# Altium PCB SMD Brushed Motor Driver V3.PcbDoc
Units mm, origin at the board's own origin, x right, y up, seen from the top; angles counter-clockwise.
Board outline 130.17 x 68.58 mm, 2 copper layers (Top Layer, Bottom Layer); 50 components, 23 nets, 136 pads, 11 vias.
Unrouted connection lines stored in the file: 1.
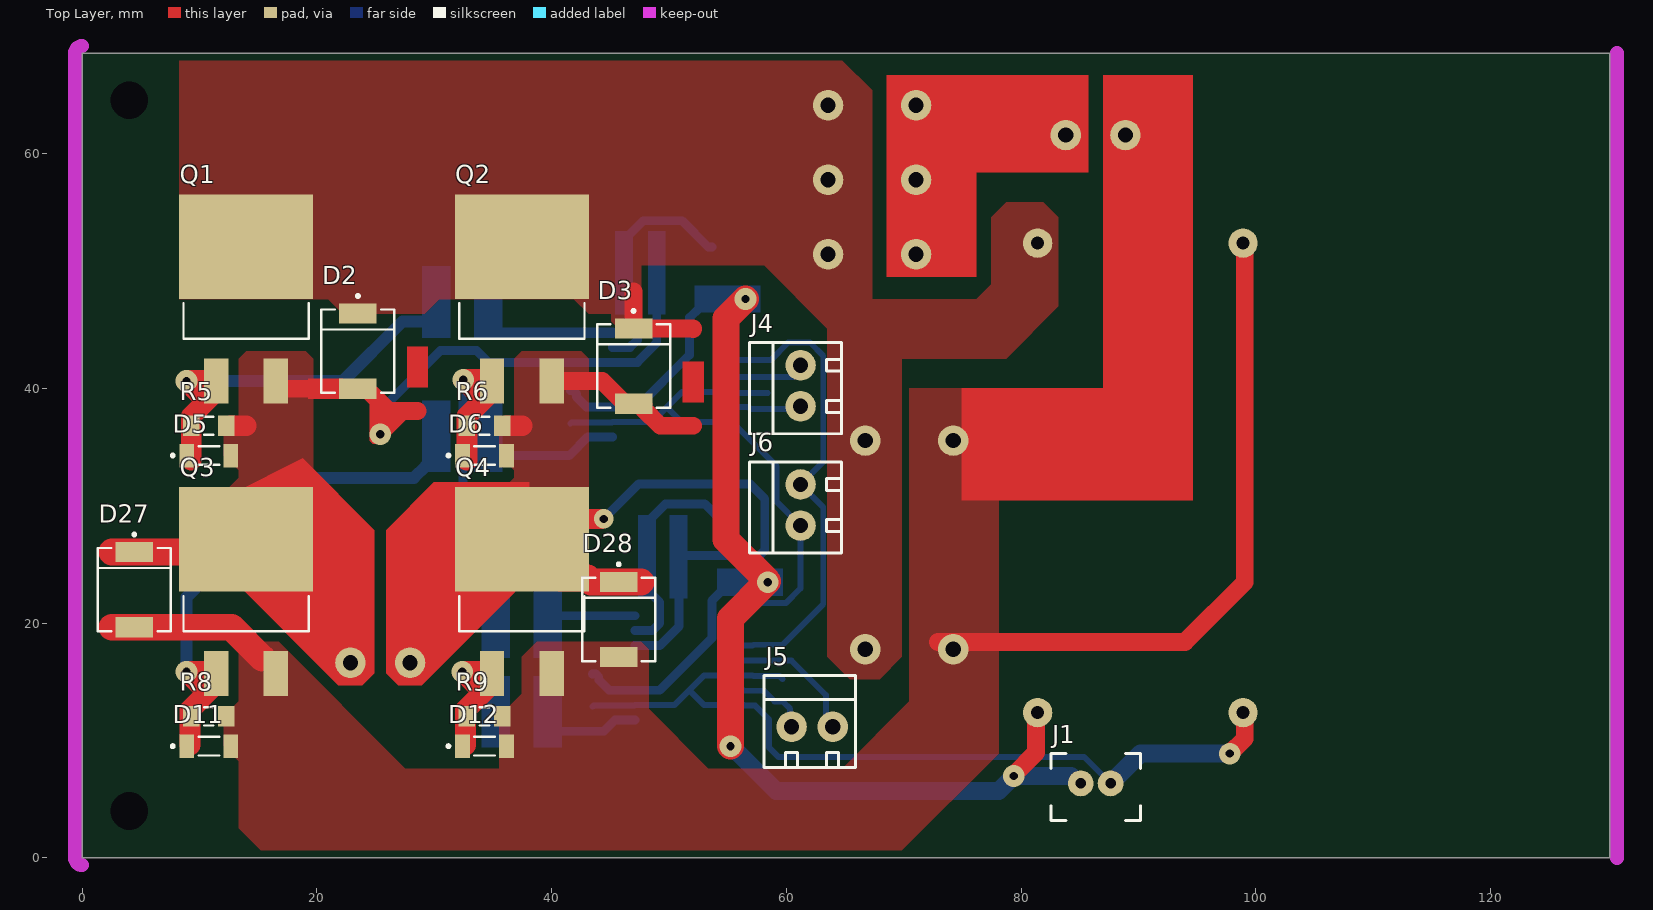
[diagram p0: Top Layer view]
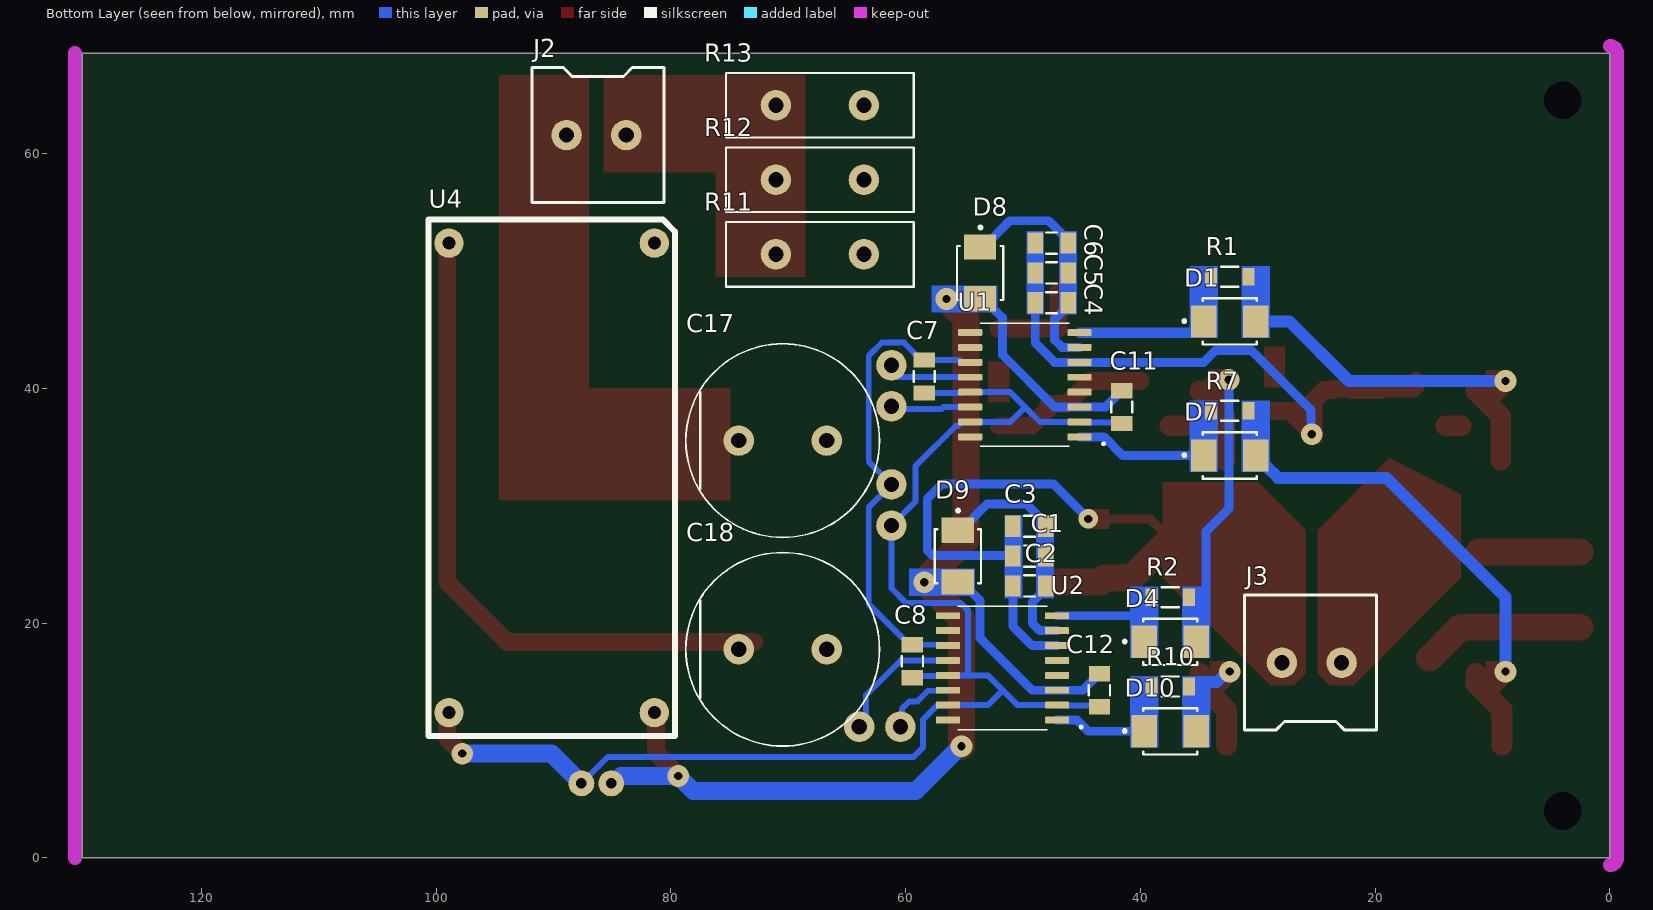
[diagram p1: Bottom Layer view, seen from below]

## Layer stack, top to bottom
Top Solder: solder mask 0.0102, Solder Resist, Dk 3.5
Top Layer: signal copper 0.0356
Dielectric 1: dielectric 0.32, FR-4, Dk 4.8
Bottom Layer: signal copper 0.0356
Bottom Solder: solder mask 0.0102, Solder Resist, Dk 3.5

## Board outline
0,0 0,68.58 130.175,68.58 130.175,0

## Design rules (kind name [scope] priority, off if disabled: settings)
Clearance [All] p1: gap=0.381 ignorepadtopadclearanceinfootprint=TRUE except(0: Arc-Hole Track-Hole SMDPad-Hole THPad-Hole Via-Hole Fill-Hole Poly-Hole Region-Hole Text-Hole)
Height [All] p1: minheight=0 maxheight=127 prefheight=12.7
PolygonConnect [All] p1: connectstyle=Direct reliefconductorwidth=0.254 reliefentries=4 polygonreliefangle="90 Angle" airgapwidth=0.254
RoutingVias [All] p1: holewidth=0.711 width=1.27 viastyle="Through Hole" minholewidth=0.711 minwidth=1.27 maxholewidth=0.711 maxwidth=1.27
SolderMaskExpansion [All] p1: expansion=0.102 istentingtop=FALSE
Width [All] p1: maxlimit=5.08 minlimit=0.254 preferedwidth=0.508 minimp=50.000000 maximp=50.000000 favimp=50.000000
29 further rules are at their usual default settings.

## Classes and differential pairs
component class "2101 Version": J4

## Components (designator, comment, footprint, x,y, rotation, side; value= is the part's Value field where it differs from the comment)
C1 "12061C474KAT2A" FP-1206-L_3_2_0_2-W_1_6_0-IPC_B 49.467,25.717 r0 bottom
C2 "12061C474KAT2A" FP-1206-L_3_2_0_2-W_1_6_0-IPC_B 49.467,23.177 r0 bottom
C3 "12061C474KAT2A" FP-1206-L_3_2_0_2-W_1_6_0-IPC_B 49.467,28.258 r0 bottom
C4 "12061C474KAT2A" FP-1206-L_3_2_0_2-W_1_6_0-IPC_B 47.561,47.307 r0 bottom
C5 "12061C474KAT2A" FP-1206-L_3_2_0_2-W_1_6_0-IPC_B 47.561,49.847 r0 bottom
C6 "12061C474KAT2A" FP-1206-L_3_2_0_2-W_1_6_0-IPC_B 47.561,52.387 r0 bottom
C7 "12065C104KAT2A" FP-1206-L_3_2_0_2-W_1_6_0-IPC_B 58.42,41.021 r270 bottom
C8 "12065C104KAT2A" FP-1206-L_3_2_0_2-W_1_6_0-IPC_B 59.436,16.764 r270 bottom
C11 "12065C104KAT2A" FP-1206-L_3_2_0_2-W_1_6_0-IPC_B 41.593,38.417 r270 bottom
C12 "12065C104KAT2A" FP-1206-L_3_2_0_2-W_1_6_0-IPC_B 43.498,14.287 r270 bottom
C17 "ECA1VM222" FP-RAD-TH-D_16_0_5-L_25_2-MFG 70.485,35.56 r180 bottom
C18 "ECA1VM222" FP-RAD-TH-D_16_0_5-L_25_2-MFG 70.485,17.78 r180 bottom
D1 "MURS120T3G" FP-403A-03-MFG 32.385,45.72 r180 bottom
D2 "SS34-E3/57T" FP-95402-MFG 23.495,43.18 r270 top
D3 "SS34-E3/57T" FP-95402-MFG 46.99,41.91 r270 top
D4 "MURS120T3G" FP-403A-03-MFG 37.464,18.415 r180 bottom
D5 "TZMC3V3-GS08" FP-6_560-5005_01-4-MFG 10.795,34.29 r0 top
D6 "TZMC3V3-GS08" FP-6_560-5005_01-4-MFG 34.29,34.29 r0 top
D7 "MURS120T3G" FP-403A-03-MFG 32.385,34.29 r180 bottom
D8 "MURS120T3G" FP-403A-03-MFG 53.657,49.847 r270 bottom
D9 "MURS120T3G" FP-403A-03-MFG 55.563,25.717 r270 bottom
D10 "MURS120T3G" FP-403A-03-MFG 37.465,10.795 r180 bottom
D11 "TZMC3V3-GS08" FP-6_560-5005_01-4-MFG 10.795,9.525 r0 top
D12 "TZMC3V3-GS08" FP-6_560-5005_01-4-MFG 34.29,9.525 r0 top
D27 "SS34-E3/57T" FP-95402-MFG 4.445,22.86 r270 top
D28 "SS34-E3/57T" FP-95402-MFG 45.72,20.32 r270 top
J1 "JST-2.54mm-2pin" "New footprint 1"#1 86.36,6.35 r0 top
J2 "2 pin terminal klemens" "New footprint 1"#2 86.36,61.595 r0 bottom
J3 "2 pin terminal klemens" "New footprint 1"#2 25.4,16.637 r180 bottom
J4 "KF350-P2" "New footprint 1"#3 60.96,40.005 r90 top
J5 "KF350-P2" "New footprint 1"#3 61.976,11.43 r0 top
J6 "KF350-P2" "New footprint 1"#3 60.96,29.845 r90 top
Q1 "IRF3205STRLPBF" FP-PG-TO263-3-MFG 13.97,49.057 r0 top
Q2 "IRF3205STRLPBF" FP-PG-TO263-3-MFG 37.465,49.057 r0 top
Q3 "IRF3205STRLPBF" FP-PG-TO263-3-MFG 13.97,24.13 r0 top
Q4 "IRF3205STRLPBF" FP-PG-TO263-3-MFG 37.465,24.13 r0 top
R1 "RC1206JR-0710RL" FP-RC1206-0_65-MFG 32.385,49.53 r180 bottom
R2 "RC1206JR-0710RL" FP-RC1206-0_65-MFG 37.465,22.225 r180 bottom
R5 "Resistor 1k +/-1% 1206 250 mW" RESC3116X70X50ML13T20 10.795,36.83 r0 top value=1k
R6 "Resistor 1k +/-1% 1206 250 mW" RESC3116X70X50ML13T20 34.29,36.83 r0 top value=1k
R7 "RC1206JR-0710RL" FP-RC1206-0_65-MFG 32.385,38.1 r180 bottom
R8 "Resistor 1k +/-1% 1206 250 mW" RESC3116X70X50ML13T20 10.795,12.065 r0 top value=1k
R9 "Resistor 1k +/-1% 1206 250 mW" RESC3116X70X50ML13T20 34.29,12.065 r0 top value=1k
R10 "RC1206JR-0710RL" FP-RC1206-0_65-MFG 37.465,14.605 r180 bottom
R11 "20mm Body 7.5mm pitch Thermistor" FP-NTPAD-MFG 67.31,51.435 r180 bottom
R12 "20mm Body 7.5mm pitch Thermistor" FP-NTPAD-MFG 67.31,57.785 r180 bottom
R13 "20mm Body 7.5mm pitch Thermistor" FP-NTPAD-MFG 67.31,64.135 r180 bottom
U1 "IR2110SPBF" IR2110SPBF-Footprint-1 49.848,40.322 r0 bottom
U2 "IR2110SPBF" IR2110SPBF-Footprint-1 51.753,16.192 r0 bottom
U4 "LM2596 Buck Converter Module" "LM2596 Buck Converter Module-Footprint-1" 90.17,32.385 r270 bottom

## Footprints (in the part's own frame and the unit in brackets; to place one, negate y for a bottom-side part, rotate by r counter-clockwise, add the part's x,y. Pads: shape width x height; smd on the part's side, far side on the other; paste and mask are expansions set on the pad)
FP-6_560-5005_01-4-MFG [mm]
  rect 1.25x2 smd paste+0 mask+0: 1(-1.875,0) 2(1.875,0)
  silkscreen extent -3.2,-0.8 0.87,0.8, body extent -2.6,-1.1 2.6,1.1, height 0.25
FP-403A-03-MFG [mm]
  rect 2.159x2.743 smd paste+0 mask+0: 1(-2.21,0) 2(2.21,0)
  silkscreen extent -4,-1.97 2.3,1.97, body extent -2.72,-1.78 2.72,1.78, height 2.47
FP-1206-L_3_2_0_2-W_1_6_0-IPC_B [mm]
  rect 1.305x1.806 smd paste+0 mask+0: 1(-1.401,0) 2(1.401,0)
  silkscreen extent -0.45,-0.9 0.45,0.9, body extent -1.6,-0.8 1.6,0.8, height 1.78
FP-95402-MFG [mm]
  rect 1.72x3.2 smd paste+0 mask+0: 1(-3.205,0) 2(3.205,0)
  silkscreen extent -4.82,-3.11 3.55,3.11, body extent -4.17,-3.21 4.17,3.21, height 0.25
FP-NTPAD-MFG [mm]
  round 2.6 hole 1.3 mask+0.051: 1(-3.75,0) 2(3.75,0)
  silkscreen extent -8,-2.75 8,2.75, body extent -8,-2.75 8,2.75, height 26
FP-PG-TO263-3-MFG [mm]
  rect 2.08x3.81 smd paste+0 mask+0: 1(-2.54,-8.417) 3(2.54,-8.417)
  rect 11.43x8.89 smd paste+0 mask+0: 2(0,3.013)
  silkscreen extent -5.34,-4.82 5.34,-1.81, body extent -5.81,-10.42 5.81,7.56, height 0.25
FP-RAD-TH-D_16_0_5-L_25_2-MFG [mm]
  round 2.6 hole 1.3 mask+0.051: 1(-3.75,0) 2(3.75,0)
  silkscreen extent -8.25,-8.25 8.25,8.25, body extent -8,-8.01 7.99,7.99, height 27
FP-RC1206-0_65-MFG [mm]
  rect 1x1.5 smd paste+0 mask+0: 1(-1.6,0) 2(1.6,0)
  silkscreen extent -0.72,-0.85 0.72,0.85, body extent -1.6,-0.79 1.62,0.81, height 0.57
IR2110SPBF-Footprint-1 [mm]
  rrect25% 2.05x0.59 smd: 1(-4.655,4.445) 2(-4.655,3.175) 3(-4.655,1.905) 4(-4.655,0.635) 5(-4.655,-0.635) 6(-4.655,-1.905) 7(-4.655,-3.175) 8(-4.655,-4.445) 9(4.655,-4.445) 10(4.655,-3.175) 11(4.655,-1.905) 12(4.655,-0.635) 13(4.655,0.635) 14(4.655,1.905) 15(4.655,3.175) 16(4.655,4.445)
  silkscreen extent -6.8,-5.25 3.8,5.25
"LM2596 Buck Converter Module-Footprint-1" [mm]
  round 2.5 hole 1.1 mask+0.051: 1(-20,8.75) 2(-20,-8.75) 3(20,8.75) 4(20,-8.75)
  silkscreen extent -22,-10.5 22,10.5, body extent -21.5,-10.5 21.5,10.5, height 13.82
"New footprint 1"#1 [mm]
  round 2.2 hole 0.9 mask+0.051: 1(-1.27,0) 2(1.27,0)
  silkscreen extent -3.81,-3.17 3.81,2.54, body extent -3.79,-3.15 3.75,2.55, height 7
"New footprint 1"#2 [mm]
  round 2.6 hole 1.3 mask+0.051: 1(-2.54,0) 2(2.54,0)
  silkscreen extent -5.75,-5.75 5.5,5.75, body extent -5.5,-5.6 5.23,5.6, height 19.34
"New footprint 1"#3 [mm]
  round 2.6 hole 1.3 mask+0.051: 1(-1.524,-0.254) 2(1.976,-0.254)
  silkscreen extent -3.86,-3.73 3.91,4.11, body extent -3.67,-3.6 3.73,3.9, height 10
RESC3116X70X50ML13T20 [mm] "Chip Resistor, 2-Leads, Body 3.25x1.65mm, IPC Low Density"
  rect 1.4x1.75 smd: 1(-1.5,0) 2(1.5,0)
  silkscreen extent -0.4,-0.77 0.4,0.77, body extent -1.63,-0.82 1.63,0.82, height 0.7

## Part data
C1 C2 C3 C4 C5 C6: library part CMP-000013-1, "1206 470 nF 100 V ±10 % Tolerance X7R Surface Mount Multilayer Ceramic Capacitor"
C7 C8 C11 C12: library part CMP-001-00084-1, "Ceramic capacitor SMD-1206 100nF /50V X7R# K +-10%, AVX, RoHS, /4000 reel/"
C17 C18: library part CMP-000011-3, "Cap Aluminum 2200uF 35V 20% (16 X 25mm) Radial 7.5mm 1250mA 2000h 85°C Bulk"
D1 D4 D7 D8 D9 D10: library part CMP-004-00033-1, "VR=200V IF=2A Trr=35ns"
D2 D3 D27 D28: library part CMP-000005-2, "DIODE SCHOTTKY 40V 3A DO214AB"
D5 D6 D11 D12: library part CMP-000009-1, "DIODE ZENER 3.3V 500MW SOD80"
J1: library part CMP-000001-1, "2 pin konnektör"
J2 J3: library part CMP-002-00072-2, "2 pin terminal klemens pin aralığı 200 mil"
J4 J5 J6: library part CMP-002-00078-2, "3.5mm mini klemens"
Q1 Q2 Q3 Q4: library part CMP-013-00038-1, "MOSFET N-CH 55V 110A D2PAK"
R1 R2 R7 R10: library part CMP-000008-1, "Res General Purpose Thick Film 1206 10 Ohm 5% 1/4W ±200ppm/°C Molded SMD Paper T/R"
R5 R6 R8 R9: library part CMP-009-00011-5, "Chip Resistor, 1 KOhm, +/- 1%, 0.25 W, -55 to 155 degC, 1206 (3216 Metric)", Case/Package=1206, Max Operating Temperature=155°C, Min Operating Temperature=-55°C, Power=250mW, Tolerance=1%, Voltage Rating=200V, Mounting Technology=SM, Pins=2, RoHS Compliant=True
R11 R12 R13: library part CMP-009-00184-2
U1 U2: library part CMP-000016-1, "500 V high-side and low-side gate driver IC with shutdown, SOIC 16W, RoHS"
U4: library part CMP-00000-1

## Free pads (board coordinates)
  round 3 hole 3.2 mask+0.051: 5(4,4) 5(4,64.58)

## Via types
v1: diameter 1.851, hole 0.7, Top Layer to Bottom Layer, 10 vias
v2: diameter 1.651, hole 0.7, Top Layer to Bottom Layer, 1 vias

## Nets (pads, with @x,y where several pads share a name; then routed paths per layer and width w, separated by ;. In a path a pad name is that pad's centre, name@x,y a point inside that pad or via, vN(x,y) a via of type N, cw(c..) or ccw(c..) an arc to the next point about the centre after c; other vN are vias at no path point)
+5: C7.1 C8.1 J6.2 U1.11 U2.11 | length 40.8
  Bottom Layer w0.508: U1.11 55.233,42.227 55.427,42.422 C7.1 58.671,42.422 60.165,43.916 62.016,43.916 63.149,42.783 63.149,33.756 J6.2 63.149,29.886 63.149,21.627 59.687,18.165 C8.1 57.205,18.165 57.138,18.098 U2.11
+12: C11.1 C12.1 D8.2 D9.2 J1.1 U1.3 U2.3 U4.3 | length 117.1
  Top Layer w1.524: v1(79.375,6.985) 79.375,7.073 81.28,8.978 U4.3@81.28,12.437
  Top Layer w2.286: v1(55.245,9.525) 55.245,20.408 58.42,23.583 54.864,27.139 54.864,45.974 v1(56.515,47.625)
  Bottom Layer w0.762: C11.1 41.843,39.818 42.115,39.547 42.115,39.296 42.993,38.417 U1.3 47.307,38.417 51.752,42.862 51.752,46.038 52.654,46.939 52.959,46.939 D8.2 ; C12.1 43.748,15.688 44.02,15.417 44.02,15.166 44.898,14.287 U2.3 49.212,14.287 53.657,18.732 53.657,21.907 54.559,22.809 54.864,22.809 D9.2
  Bottom Layer w1.524: v1(55.245,9.525) 55.333,9.525 59.143,5.715 78.105,5.715 v1(79.375,6.985) ; v1@79.463,6.985 84.272,6.985 84.907,6.35 J1.1 J1.1@85.219,6.221
  other v1: 58.42,23.495
BAT: J2.1 R11.1 R12.1 R13.1
GND: C7.2 C8.2 C11.2 C12.2 C17.1 C18.1 D11.2 D12.2 D27.2 D28.2 J1.2 J2.2 J6.1 Q3.3 Q4.3 R8.2 R9.2 U1.2 U1.13 U1.15 U2.2 U2.13 U2.15 U4.2 U4.4 | length 196.9
  Top Layer w1.524: 72.932,18.415 93.98,18.415 99.06,23.495 U4.2@99.06,51.934 ; v1(97.79,8.89) 99.06,10.16 U4.4@99.06,11.953
  Top Layer w2.286: 2.54,19.655 D27.2 12.73,19.655 15.375,17.01
  Bottom Layer w0.508: C11.2 41.682,37.106 45.152,37.106 U1.2 48.557,37.148 49.827,38.417 ; C12.2 43.587,12.976 47.057,12.976 U2.2 50.462,13.018 51.732,14.287 ; C7.2 55.3,39.62 55.233,39.688 U1.13 51.097,39.688 49.827,38.417 ; C8.2@59.69,15.24 59.44,15.49 57.205,15.49 57.138,15.557 U2.13 54.705,15.557 ; J1.2 85.363,8.617 59.328,8.617 58.517,9.428 58.517,11.813 57.353,12.976 56.449,12.976 U2.15 53.002,13.018 51.732,14.287 ; 49.827,38.417 51.097,37.148 U1.15 55.233,37.148 55.573,36.808 55.747,36.808 59.182,33.373 59.182,30.353 J6.1 61.214,22.978 59.953,21.717 55.312,21.717 54.705,21.11 54.705,15.557 ; 51.732,14.287 53.002,15.557 54.705,15.557
  Bottom Layer w1.524: J1.2 90.17,8.89 v1(97.79,8.89)
HG1: D1.2 D5.1 Q1.1 R1.2 R5.1 | length 37.2
  Top Layer w0.508: v1(8.89,40.64) 10.644,40.64 11.43,39.854 Q1.1@11.43,39.775
  Top Layer w1.778: D5.1@9.295,33.885 R5.1 9.295,37.64 Q1.1@11.43,39.775
  Bottom Layer w1.016: v1(8.89,40.64) 22.225,40.64 27.305,45.72 D1.2 30.785,46.33 R1.2
HG2: D4.2 D6.1 Q2.1 R2.2 R6.1 | length 29.9
  Top Layer w0.508: v1(32.467,40.751) 34.139,40.751 34.925,39.965 Q2.1@34.925,39.775
  Top Layer w1.778: D6.1@32.79,33.885 R6.1 32.79,37.64 Q2.1@34.925,39.775
  Bottom Layer w0.762: v1(32.467,40.751) 32.467,29.763 34.417,27.814 34.417,22.098 34.925,21.59
HIN1: J4.2 U1.12 | length 6.6
  Bottom Layer w0.508: U1.12 54.506,40.961 60.646,40.961 J4.2@60.96,41.275
HIN2: J5.2 U2.12 | length 11
  Bottom Layer w0.508: U2.12 60.425,16.828 63.373,13.88 63.373,11.374 J5.2@63.571,11.176
HO1: D1.1 R1.1 U1.8 | length 11.1
  Bottom Layer w0.889: D1.1 34.595,45.466 35.294,44.767 U1.8
HO2: D4.1 R2.1 U2.8 | length 9
  Bottom Layer w0.762: D4.1@39.065,19.024 D4.1 D4.1@39.674,18.123 ; 39.37,20.32 39.688,20.637 U2.8
LG1: D7.2 D11.1 Q3.1 R7.2 R8.1 | length 46.5
  Top Layer w0.508: v1(8.89,15.875) 11.268,15.875 Q3.1
  Top Layer w1.778: D11.1@9.184,9.636 9.184,12.602 11.43,14.848 Q3.1
  Bottom Layer w1.016: v1(8.89,15.875) 8.89,22.225 19.05,32.385 28.27,32.385 29.311,33.426 29.603,33.426 30.175,33.998 D7.2 30.785,34.9 R7.2
LG2: D10.2 D12.1 Q4.1 R9.1 R10.2 | length 12.7
  Top Layer w0.508: v1(32.385,15.875) 34.763,15.875 Q4.1
  Top Layer w1.778: D12.1@32.679,9.636 32.679,12.602 34.925,14.848 Q4.1
  Bottom Layer w1.016: v1(32.385,15.875) 32.611,15.875 33.5,14.986 34.544,14.986 34.925,14.605
LIN1: J4.1 U1.14 | length 6.7
  Bottom Layer w0.508: U1.14 56.788,38.417 56.936,38.269 60.037,38.269 60.502,38.735 J4.1@60.96,38.735
LIN2: J5.1 U2.14 | length 6.7
  Bottom Layer w0.508: U2.14 56.449,14.246 58.099,14.246 59.011,13.335 59.69,13.335 60.325,12.7 60.325,11.253 J5.1@60.783,10.795
LO1: D7.1 R7.1 U1.1 | length 11.3
  Bottom Layer w0.762: D7.1 41.499,34.29 43.086,35.877 U1.1
LO2: D10.1 R10.1 U2.1 | length 8.7
  Bottom Layer w0.762: D10.1@39.065,11.405 D10.1 44.45,10.795 45.402,11.747 U2.1
NetC28_1: 
NetC29_1: 
VB1: C4.1 C5.1 C6.1 D8.1 U1.7 | length 15.4
  Bottom Layer w0.762: U1.7 46.672,43.497 47.307,44.133 47.307,45.91 46.161,47.057 C4.1 ; C6.1 46.161,52.638 47.815,54.292 51.13,54.292 53.365,52.058 D8.1
VB2: C1.1 C2.1 C3.1 D9.1 U2.7 | length 15.4
  Bottom Layer w0.762: U2.7 48.578,19.367 49.212,20.002 49.212,21.78 48.066,22.927 C2.1 ; C3.1 48.066,28.508 49.72,30.162 53.035,30.162 55.27,27.928 D9.1
VCC: C17.2 C18.2 D2.1 D3.1 Q1.2 Q2.2 R11.2 R12.2 R13.2 U4.1 | length 8.2
  Top Layer w1.524: 46.99,48.26 D3.1 52.04,45.115 52.07,45.085
VS1: C4.2 C5.2 C6.2 D2.2 D5.2 D27.1 J3.2 Q1.3 Q3.2 R5.2 U1.6 | length 58
  Top Layer w0.762: v1(25.4,36.104) 25.4,36.399 26.664,37.663 26.664,38.094
  Top Layer w1.524: Q1.3 16.51,40.253 16.788,39.975 D2.2 23.593,39.877 24.333,39.877 26.116,38.094 26.664,38.094 28.575,38.094
  Top Layer w1.778: R5.2@12.7,36.83 13.97,36.83
  Top Layer w2.286: 2.54,26.065 D27.1 Q3.2@11.152,26.065
  Bottom Layer w0.762: v1(25.4,36.104) 25.473,36.177 25.473,38.173 30.543,43.243 33.592,43.243 34.608,42.227 U1.6 47.307,42.227 48.962,43.882 C4.2
VS2: C1.2 C2.2 C3.2 D3.2 D6.2 D28.1 J3.1 Q2.3 Q4.2 R6.2 U2.6 | length 69.7
  Top Layer w0.762: Q4.2 39.215,28.892 v2(44.45,28.892)
  Top Layer w1.524: Q2.3 44.315,40.64 46.25,38.705 D3.2 47.73,38.705 47.828,38.607 47.828,38.252 49.256,36.824 52.07,36.824
  Top Layer w1.778: R6.2@36.195,36.83 37.465,36.83
  Top Layer w2.286: Q4.2 40.767,23.841 43.061,23.841 43.376,23.525 D28.1 47.625,23.525
  Bottom Layer w0.762: v2(44.45,28.892) 47.434,31.877 56.896,31.877 58.166,30.607 58.166,26.219 57.72,25.772 C1.2@50.867,25.772 ; U2.6 49.212,18.098 50.867,19.752 C2.2
pads on no net: U1.4 U1.5 U1.9 U1.10 U1.16 U2.4 U2.5 U2.9 U2.10 U2.16
copper on no net: | length 3.1
  Top Layer w1.524: 28.575,40.894 28.575,42.697 ; 52.07,40.005 52.07,41.275

## Polygon pours and split planes (outlines as drawn)
VCC on Top Layer "VCC_L01_P017" (solid, pour order 17): 20.955,48.26 20.955,47.625 22.225,46.355 29.21,46.355 31.115,48.26
GND on Top Layer "GND_L01_P008" (solid, remove dead copper, pour order 8): 47.625,18.415 48.26,17.78 48.26,12.7 53.34,7.62 64.77,7.62 70.485,13.335 70.485,40.005 78.105,40.005 78.105,8.89 69.85,0.635 15.24,0.635 13.335,2.54 13.335,8.255 12.7,8.89 12.065,9.525 12.065,12.065 13.335,13.335 13.335,17.78 13.97,18.415 16.739,18.415 27.534,7.62 35.56,7.62 35.56,12.065 37.465,13.97 37.465,17.145 38.735,18.415
VCC on Top Layer "VCC_L01_P004" (solid, remove dead copper, pour order 4): 67.31,47.625 76.2,47.625 77.47,48.895 77.47,54.61 78.74,55.88 81.915,55.88 83.185,54.61 83.185,46.99 78.74,42.545 69.85,42.545 69.85,17.145 67.945,15.24 65.405,15.24 63.5,17.145 63.5,45.085 58.102,50.482 43.18,50.482 43.18,67.945 64.77,67.945 67.31,65.405
VCC on Top Layer "VCC_L01_P016" (solid, pour order 16): 45.085,46.355 45.085,45.72 45.72,45.085 45.75,45.115 46.99,45.115 46.99,47.625 46.355,46.99 45.085,46.99
VS1 on Top Layer "VS1_L01_P005" (solid, remove dead copper, pour order 5): 13.335,37.465 12.065,36.195 12.065,34.29 13.335,33.02 13.335,32.385 12.065,31.115 12.7,30.48 19.685,30.48 19.685,42.545 19.05,43.18 13.97,43.18 13.335,42.545
VS2 on Top Layer "VS2_L01_P000" (solid, remove dead copper, pour order 0): 36.83,37.465 35.56,36.195 35.56,34.29 36.83,33.02 36.83,32.385 35.56,31.115 36.195,30.48 43.18,30.48 43.18,42.545 42.545,43.18 37.465,43.18 36.83,42.545
VCC on Top Layer "VCC_L01_P003" (solid, remove dead copper, pour order 3): 47.625,48.895 47.625,46.99 46.99,46.355 43.18,46.355 41.91,47.625 41.91,48.895
VCC on Top Layer "VCC_L01_P001" (solid, remove dead copper, pour order 1): 8.255,47.625 46.99,47.625 47.625,48.26 47.625,66.675 46.355,67.945 8.255,67.945

## Keep-outs
Keep-Out Layer:
  lines w1.2: 130.775,0 130.775,68.58 ; -0.6,0 ccw(c0,0) 0,-0.6 cw(c0,0) -0.6,0 ; -0.6,0 -0.6,68.58 ; -0.6,68.58 cw(c0,68.58) 0,69.18 ccw(c0,68.58) -0.6,68.58

## Other copper
Top Layer:
  rectangle: 27.661,40.081 29.489,43.561
  rectangle: 51.156,38.811 52.984,42.291
  region net VS2: 28.956,14.732 38.1,23.876 38.1,32.004 29.972,32.004 25.908,27.94 25.908,15.748 26.924,14.732
  region net VS1: 21.844,14.732 12.7,23.876 12.7,30.988 18.796,34.036 24.892,27.94 24.892,15.748 23.876,14.732
  region net GND: 86.995,66.675 94.615,66.675 94.615,30.48 74.93,30.48 74.93,40.005 86.995,40.005
  region net BAT: 68.58,49.53 76.2,49.53 76.2,58.42 85.725,58.42 85.725,66.675 68.58,66.675
  region net VS1: 22.225,40.843 19.253,40.843 19.253,39.116 22.225,39.116
  region net LG2: 32.303,16.78 34.081,16.78 34.081,13.986 33.065,13.986 31.541,15.51
  region net LG1: 8.808,16.78 10.586,16.78 10.586,13.986 9.57,13.986 8.046,15.51
  region net HG1: 8.808,41.545 10.586,41.545 10.586,38.751 9.57,38.751 8.046,40.275
  region net VS2: 44.45,29.718 42.672,29.718 42.672,28.067 44.45,28.067
  region net VS1: 24.511,38.735 24.511,35.56 24.765,35.306 25.527,35.306 27.686,37.465
  region net HG2: 32.385,41.656 34.163,41.656 34.163,38.862 33.147,38.862 31.623,40.386
Bottom Layer:
  region net HG1: 31.369,50.419 28.956,50.419 28.956,44.323 31.369,44.323
  region net LG1: 31.369,38.989 28.956,38.989 28.956,32.893 31.369,32.893
  region net LG2: 36.449,15.494 34.036,15.494 34.036,9.398 36.449,9.398
  region net HG2: 36.449,23.114 34.036,23.114 34.036,17.018 36.449,17.018
  rectangle net LO2: 38.481,9.398 40.894,15.494
  rectangle net HO2: 38.48,17.018 40.893,23.114
  region net VS2: 51.562,22.098 51.562,29.21 50.038,29.21 50.038,22.098
  region net VB2: 48.895,22.098 48.895,29.21 47.371,29.21 47.371,22.098
  rectangle net LO1: 33.401,32.893 35.814,38.989
  rectangle net HO1: 33.401,44.323 35.814,50.419
  region net VB1: 46.919,46.291 46.919,53.404 45.395,53.404 45.395,46.291
  region net VS1: 49.721,46.291 49.721,53.404 48.197,53.404 48.197,46.291
  region net +12: 52.197,48.768 52.197,46.482 57.785,46.482 57.785,48.768
  region net +12: 54.102,24.638 54.102,22.352 59.69,22.352 59.69,24.638

## Silkscreen, mask and mechanical layers (free items; w line width, h text height)
Drill Drawing:
  lines w0.254: 0,0 0,68.58 ; 130.175,0 130.175,68.58